# Altium PCB theremania_test_board2.PcbDoc
Units mil, origin at the board's own origin, x right, y up, seen from the top; angles counter-clockwise.
Board outline 3500 x 2640 mil, 2 copper layers (Top Layer, Bottom Layer); 77 components, 50 nets, 239 pads, 15 vias.
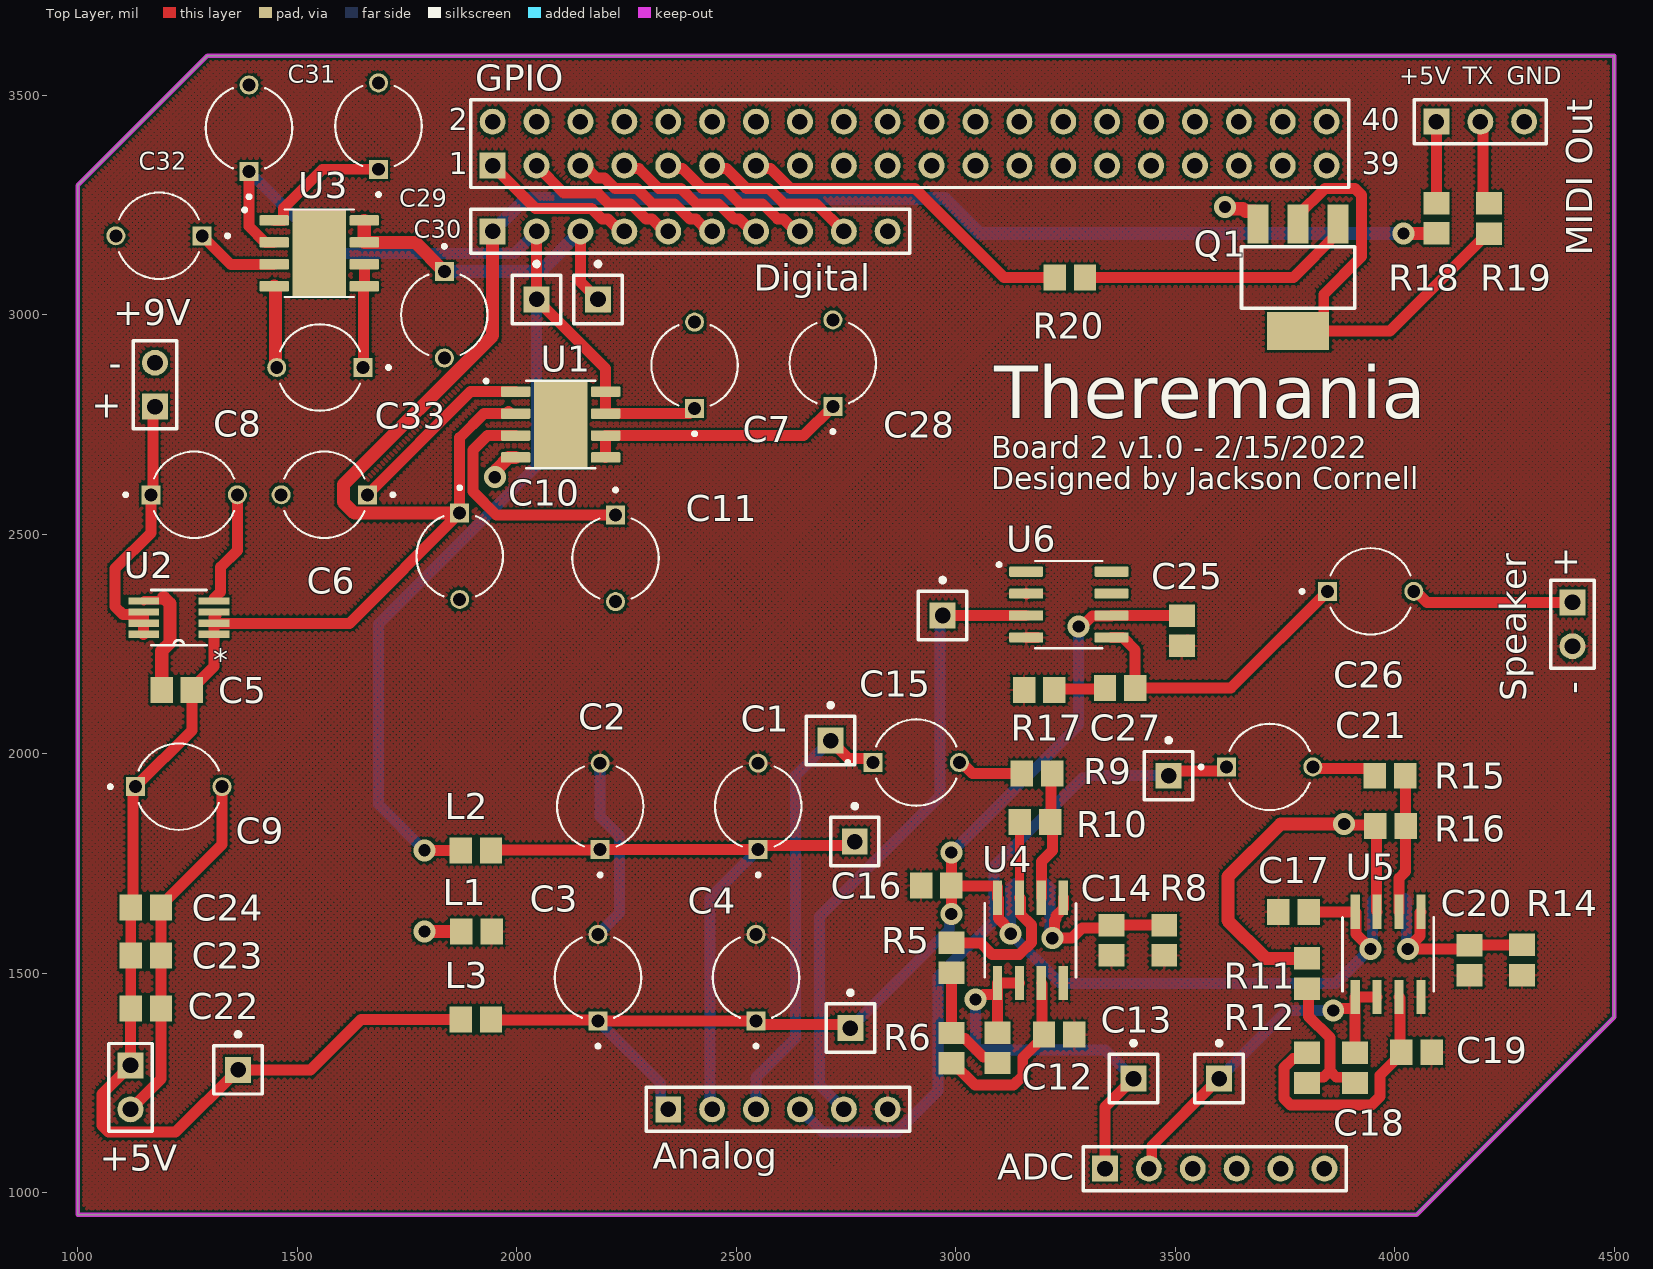
[diagram p0: Top Layer view]
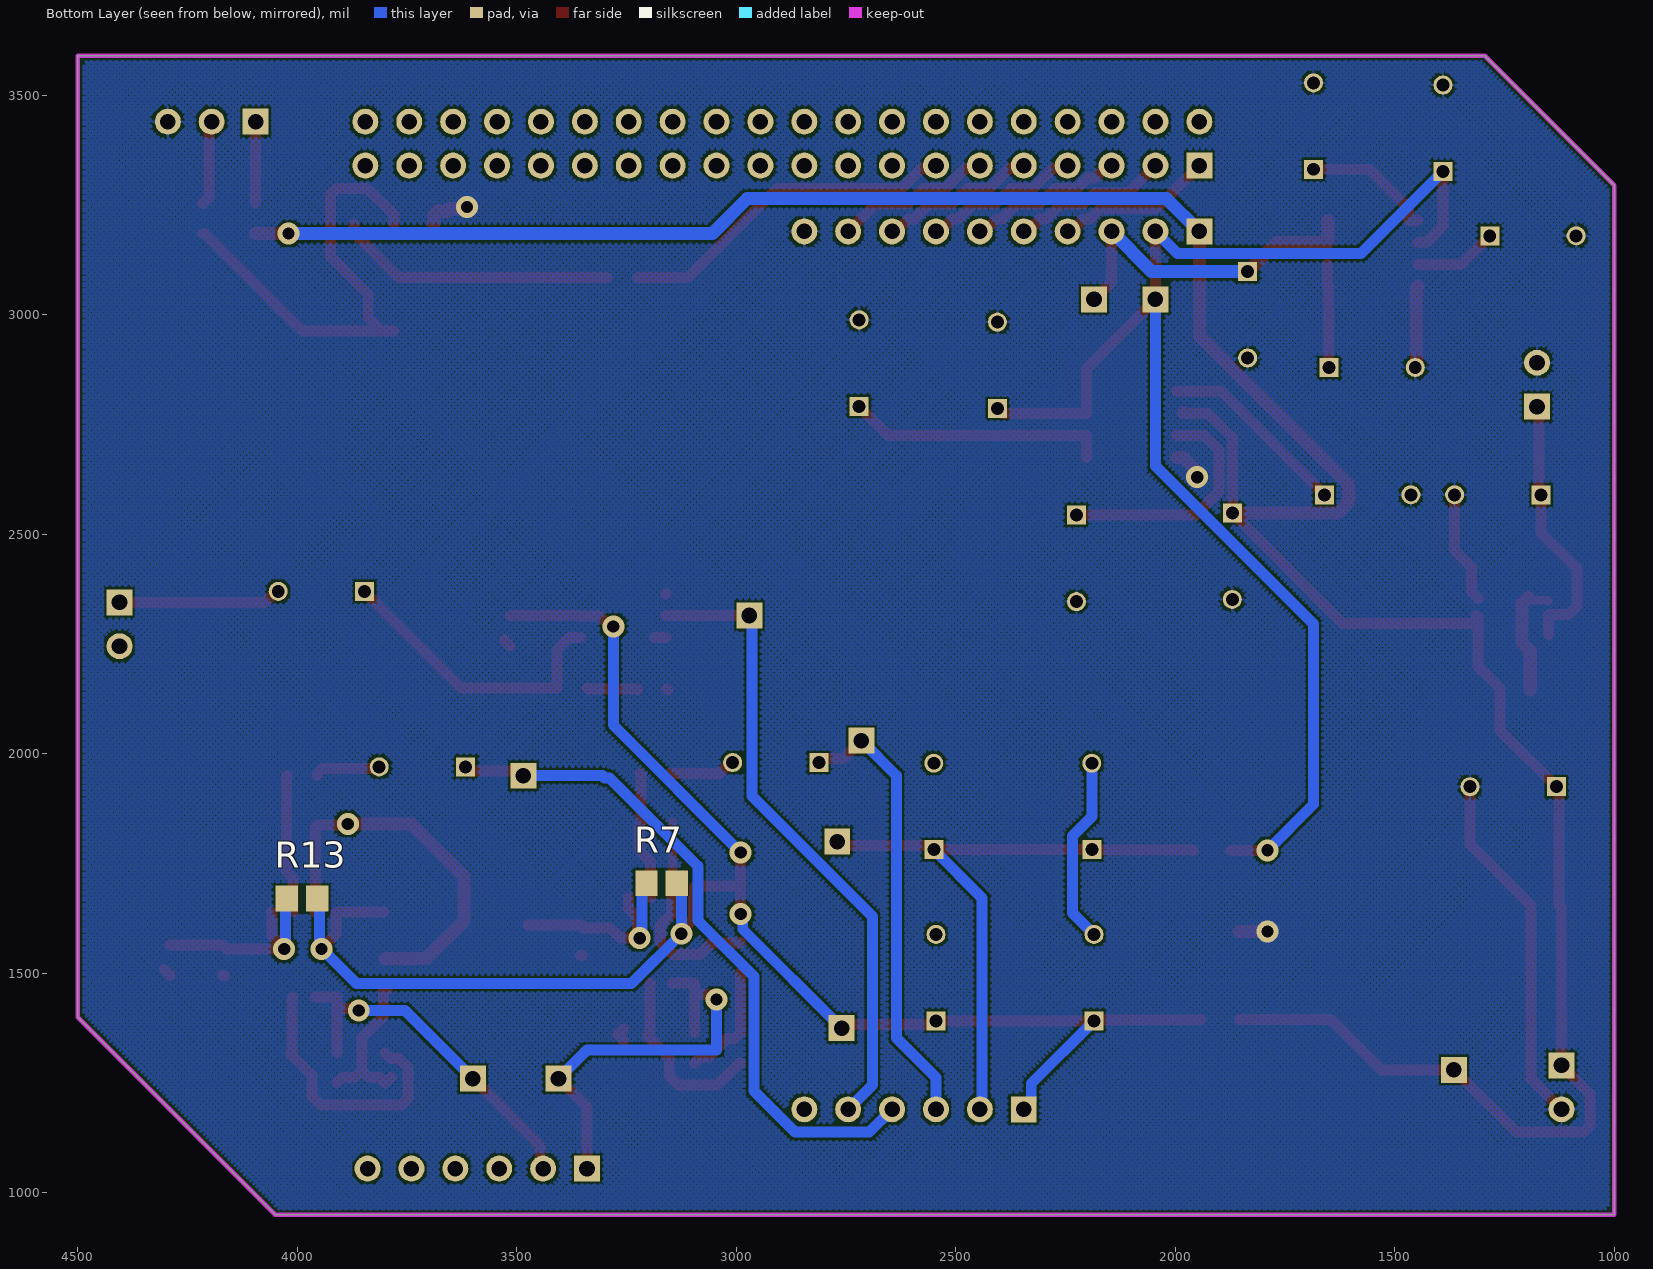
[diagram p1: Bottom Layer view, seen from below]

## Layer stack, top to bottom
Top Solder: solder mask 0.4, Solder Resist, Dk 3.5
Top Layer: signal copper 1.4
Dielectric 1: dielectric 12.6, FR-4, Dk 4.8
Bottom Layer: signal copper 1.4
Bottom Solder: solder mask 0.4, Solder Resist, Dk 3.5

## Board outline
1000,950 1000,3295 1295,3590 4500,3590 4500,1400 4050,950

## Design rules (kind name [scope] priority, off if disabled: settings)
BoardOutlineClearance [All] p1: gap=7.87 ignorepadtopadclearanceinfootprint=FALSE
Clearance [All] p1: gap=5 ignorepadtopadclearanceinfootprint=FALSE except(9.84: Arc-Hole Track-Hole SMDPad-Hole THPad-Hole Via-Hole Fill-Hole Poly-Hole Region-Hole)
ComponentClearance [All] p1: gap=5 collisioncheckmode=3 verticalgap=5 showdistances=TRUE
DiffPairsRouting [All] p1: maxlimit=10 minlimit=5 mostfreqgap=5 toplayer_minwidth=5 toplayer_maxwidth=1000 toplayer_prefwidth=5 bottomlayer_minwidth=5 bottomlayer_maxwidth=1000 bottomlayer_prefwidth=5 maxuncoupledlength=5
Height [All] p1: minheight=0 maxheight=71497.94 prefheight=71497.94
HoleSize [All] p1: absolutevalues=TRUE maxlimit=248.03 minlimit=11.81 maxpercent=80.000 minpercent=20.000
HoleToHoleClearance [All] p1: gap=9.84 allowstackedmicrovias=TRUE
LayerPairs [All] p1: enforce=FALSE
MinimumSolderMaskSliver [All] p1: minsoldermaskwidth=0
PlaneConnect PlaneConnectPowerPads [InPadClass('PowerPads')] p1: planeconnectstyle=Direct reliefexpansion=20 reliefentries=4 reliefconductorwidth=10 reliefairgap=10
PlaneConnect [All] p2: pad.planeconnectstyle=Relief pad.reliefexpansion=11.81 pad.reliefentries=4 pad.reliefconductorwidth=5 pad.reliefairgap=5 via.planeconnectstyle=Direct via.reliefexpansion=11.81 via.reliefentries=4 via.reliefconductorwidth=5 via.reliefairgap=10
PolygonConnect PolygonConnectPowerPads [All vs (InPadClass('PowerPads'))] p1: connectstyle=Direct reliefconductorwidth=10 reliefentries=4 polygonreliefangle="90 Angle" airgapwidth=10
PolygonConnect [All] p2: thpad.connectstyle=Relief thpad.reliefconductorwidth=5 thpad.reliefentries=4 thpad.polygonreliefangle="90 Angle" thpad.airgapwidth=5 smdpad.connectstyle=Relief smdpad.reliefconductorwidth=5 smdpad.reliefentries=4 smdpad.polygonreliefangle="90 Angle" smdpad.airgapwidth=5 via.connectstyle=Direct via.reliefconductorwidth=5 via.reliefentries=4 via.polygonreliefangle="90 Angle" via.airgapwidth=10
RoutingVias [All] p1: holewidth=11.81 width=23.62 viastyle="Through Hole" minholewidth=11.81 minwidth=23.62 maxholewidth=23.62 maxwidth=50
SilkToSilkClearance [All] p1: silktosilkclearance=0
SilkToSolderMaskClearance [IsPad] p1 off: minsilkscreentomaskgap=10 clearancetoexposedcopper=TRUE
SolderMaskExpansion [All] p1: expansion=4
Width [All] p1: maxlimit=1000 minlimit=5 preferedwidth=5 minimp=50.000000 maximp=50.000000 favimp=50.000000
20 further rules are at their usual default settings.

## Classes and differential pairs
component class speaker: C25 C26 C27 R17 Speaker U6
component class preamp: C12 C13 C14 C15 C16 C17 C18 C19 C20 C21 R5 R6 R7 R8 R9 R10 R11 R12 R13 R14 R15 R16 U4 U5
component class power: +9V C1 C2 C3 C4 C5 C6 C7 C8 C9 C10 C11 L1 L2 L3 U1 U2 U3
component class midi: "MIDI Out" R18 R19 R20
component class fpga: +5V ADC C22 C23 C24 GPIO
component class connectors: Analog Digital

## Components (designator, comment, footprint, x,y, rotation, side; value= is the part's Value field where it differs from the comment)
+5V "Header 2" HDR1X2 1120,1290 r270 top
+9V "Header 2" HDR1X2 1175.79,2790.79 r90 top
ADC "Header 6" HDR1X6 3340,1055 r0 top
Analog "Header 6" HDR1X6 2345,1190 r0 top
C1 "10uF" CAPPRD500W50D500H1100 2550,1880 r90 top
C2 "10uF" CAPPRD500W50D500H1100 2190,1880 r90 top
C3 "10uF" CAPPRD500W50D500H1100 2185,1490 r90 top
C4 "10uF" CAPPRD500W50D500H1100 2545,1490 r90 top
C5 "Cap" CAPC0805 1225.55,2145 r0 top value=100pF
C6 "10uF" CAPPRD500W50D500H1100 1561.57,2590 r180 top
C7 "10uF" CAPPRD500W50D500H1100 2405,2885 r90 top
C8 "1uF" CAPPRD500W50D500H1100 1265,2590 r0 top
C9 "1uF" CAPPRD500W50D500H1100 1230,1925 r0 top
C10 "10uF" CAPPRD500W50D500H1100 1870,2450 r270 top
C11 "1uF" CAPPRD500W50D500H1100 2225,2445 r270 top
C12 "Cap" CAPC0805 3095,1330 r90 top value=30pF
C13 "Cap" CAPC0805 3235.55,1360 r180 top value=3pF
C14 "Cap" CAPC0805 3355,1575 r90 top value=0.1uF
C15 "10uF" CAPPRD500W50D500H1100 2910,1980 r0 top
C16 "Cap" CAPC0805 2955.55,1700 r0 top value=0.1uF
C17 "Cap" CAPC0805 3769.45,1640 r0 top value=0.1uF
C18 "Cap" CAPC0805 3910,1284.45 r90 top value=30pF
C19 "Cap" CAPC0805 4049.45,1320 r180 top value=3pF
C20 "Cap" CAPC0805 4170,1529.45 r90 top value=0.1uF
C21 "10uF" CAPPRD500W50D500H1100 3715,1970 r0 top
C22 "Cap" CAPC0805 1155,1420 r180 top value=0.1uF
C23 "Cap" CAPC0805 1155,1540 r180 top value=0.1uF
C24 "Cap" CAPC0805 1155,1650 r180 top value=0.1uF
C25 "Cap" CAPC0805 3515,2280 r90 top value=0.1uF
C26 "270uF" CAPPRD500W50D500H1100 3945,2370 r0 top
C27 "Cap" CAPC0805 3374.45,2150 r180 top value=0.047uF
C28 "1uF" CAPPRD500W50D500H1100 2720,2890 r90 top
C29 "10uF" CAPPRD500W50D500H1100 1685,3430 r90 top
C30 "10uF" CAPPRD500W50D500H1100 1835,3000 r270 top
C31 "10uF" CAPPRD500W50D500H1100 1390,3425 r90 top
C32 "1uF" CAPPRD500W50D500H1100 1185,3180 r180 top
C33 "1uF" CAPPRD500W50D500H1100 1551.57,2880 r180 top
Digital "Header 10" HDR1X10 1945,3190 r0 top
GPIO "Header 20X2" HDR2X20 1945,3340 r0 top
L1 "FB" RES0805 1908.15,1595 r180 top
L2 "FB" RES0805 1906.85,1780 r0 top
L3 "FB" RES0805 1906.85,1395 r0 top
"MIDI Out" "Header 3" HDR1X3 4095,3440 r0 top
P9 "Plug" PIN1 2970,2315 r0 top
P10 "Plug" PIN1 1365,1280 r0 top
P11 "Plug" PIN1 2715,2030 r0 top
P12 "Plug" PIN1 2760,1375 r0 top
P13 "Plug" PIN1 3485,1950 r0 top
P14 "Plug" PIN1 2045,3035 r0 top
P15 "Plug" PIN1 3405,1260 r0 top
P16 "Plug" PIN1 2770,1800 r0 top
P17 "Plug" PIN1 3600,1260 r0 top
P18 "Plug" PIN1 2185,3035 r0 top
Q1 "BCP56HX" SOT-223 3780,3085 r180 top
R5 "Res3" RES0805 2990,1535.55 r270 top value=1K
R6 "Res3" RES0805 2990,1329.45 r270 top value=22K
R7 "Res3" RES0805 3170,1705 r0 bottom value=1K
R8 "Res3" RES0805 3475,1575 r90 top value=1K
R9 "Res3" RES0805 3185,1955 r0 top value=10K
R10 "Res3" RES0805 3180.55,1845 r180 top value=10K
R11 "Res3" RES0805 3800,1499.45 r270 top value=1K
R12 "Res3" RES0805 3800,1284.45 r90 top value=22K
R13 "Res3" RES0805 3989.45,1670 r0 bottom value=1K
R14 "Res3" RES0805 4290,1530 r90 top value=1K
R15 "Res3" RES0805 3989.45,1950 r0 top value=10K
R16 "Res3" RES0805 3990.55,1835 r180 top value=10K
R17 "Res" RES0805 3190,2145 r180 top value=10
R18 "Res" RES0805 4095,3220 r90 top value=220
R19 "Res" RES0805 4215,3219.45 r90 top value=220
R20 "Res" RES0805 3260,3085 r0 top value=10k
Speaker "Header 2" HDR1X2 4405,2345 r270 top
U1 "LDO" SOIC127P600X175-9N 2100,2750 r0 top
U2 "ADP3335ARMZ-5" SOP65P490X110-8N 1230,2310 r180 top
U3 "LDO" SOIC127P600X175-9N 1550,3140 r0 top
U4 "LT1632CS8PBF" SO-8_S 3170,1575 r90 top
U5 "LT1632CS8PBF" SO-8_S 3985,1543 r90 top
U6 "LM386M-1/NOPB" SOIC127P599X175-8N 3257.76,2340 r0 top

## Footprints (in the part's own frame and the unit in brackets; to place one, negate y for a bottom-side part, rotate by r counter-clockwise, add the part's x,y. Pads: shape width x height; smd on the part's side, far side on the other; paste and mask are expansions set on the pad)
CAPC0805 [mm] "Chip Capacitor, 2-Leads, Body 2.01x1.25mm, IPC Medium Density"
  rect 1.3x1.5 smd: 1(-0.875,0) 2(0.875,0)
  body extent -1.1,-0.72 1.11,0.72, height 1.8
CAPPRD500W50D500H1100 [mm]
  round 1.1 hole 0.75: N(2.5,0)
  rect 1.1x1.1 hole 0.75: P(-2.5,0)
  silkscreen extent -4.06,-2.5 2.32,2.5, body extent -2.75,-2.5 2.75,2.5, height 11
HDR1X2 [mm] "Connector; Header; 2 Position"
  rect 1.5x1.5 hole 0.9: 1(0,0)
  round 1.5 hole 0.9: 2(2.54,0)
  silkscreen extent -1.27,-1.27 3.81,1.27
HDR1X3 [mm] "Connector; Header; 3 Position"
  rect 1.5x1.5 hole 0.9: 1(0,0)
  round 1.5 hole 0.9: 2(2.54,0) 3(5.08,0)
  silkscreen extent -1.27,-1.27 6.35,1.27
HDR1X6 [mm] "Connector; Header; 6 Position"
  rect 1.5x1.5 hole 0.9: 1(0,0)
  round 1.5 hole 0.9: 2(2.54,0) 3(5.08,0) 4(7.62,0) 5(10.16,0) 6(12.7,0)
  silkscreen extent -1.27,-1.27 13.97,1.27
HDR1X10 [mm] "Connector; Header; 10 Position"
  rect 1.5x1.5 hole 0.9: 1(0,0)
  round 1.5 hole 0.9: 2(2.54,0) 3(5.08,0) 4(7.62,0) 5(10.16,0) 6(12.7,0) 7(15.24,0) 8(17.78,0) 9(20.32,0) 10(22.86,0)
  silkscreen extent -1.27,-1.27 24.13,1.27
HDR2X20 [mm] "Connector; Header; 20x2 Position"
  rect 1.5x1.5 hole 0.9: 1(0,0)
  round 1.5 hole 0.9: 2(0,2.54) 3(2.54,0) 4(2.54,2.54) 5(5.08,0) 6(5.08,2.54) 7(7.62,0) 8(7.62,2.54) 9(10.16,0) 10(10.16,2.54) 11(12.7,0) 12(12.7,2.54) 13(15.24,0) 14(15.24,2.54) 15(17.78,0) 16(17.78,2.54) 17(20.32,0) 18(20.32,2.54) 19(22.86,0) 20(22.86,2.54) 21(25.4,0) 22(25.4,2.54) 23(27.94,0) 24(27.94,2.54) 25(30.48,0) 26(30.48,2.54) 27(33.02,0) 28(33.02,2.54) 29(35.56,0) 30(35.56,2.54) 31(38.1,0) 32(38.1,2.54) 33(40.64,0) 34(40.64,2.54) 35(43.18,0) 36(43.18,2.54) 37(45.72,0) 38(45.72,2.54) 39(48.26,0) 40(48.26,2.54)
  silkscreen extent -1.27,-1.27 49.53,3.81
PIN1 [mm] "Connector; Plug"
  rect 1.5x1.5 hole 0.9: 1(0,0)
  silkscreen extent -1.4,-1.4 1.4,2.17
RES0805 [mm] "Chip Resistor, 2-Leads, Body 2.01x1.25mm, IPC Medium Density"
  rect 1.3x1.5 smd: 1(-0.875,0) 2(0.875,0)
  body extent -1.1,-0.72 1.11,0.72, height 1.8
SO-8_S [mil]
  rect 78x21 smd: 1(-97,75) 2(-97,25) 3(-97,-25) 4(-97,-75) 5(97,-75) 6(97,-25) 7(97,25) 8(97,75)
  silkscreen extent -84,-104 84,104
SOIC127P599X175-8N [mm]
  rrect25% 1.97x0.6 smd: 1(-2.47,1.905) 2(-2.47,0.635) 3(-2.47,-0.635) 4(-2.47,-1.905) 5(2.47,-1.905) 6(2.47,-0.635) 7(2.47,0.635) 8(2.47,1.905)
  silkscreen extent -4.14,-2.52 1.95,2.52
SOIC127P600X175-9N [mm]
  rrect25% 1.71x0.61 smd: 1(-2.605,1.905) 2(-2.605,0.635) 3(-2.605,-0.635) 4(-2.605,-1.905) 5(2.605,-1.905) 6(2.605,-0.635) 7(2.605,0.635) 8(2.605,1.905)
  rect 3.1x5 smd paste-3: 9(0,0)
  silkscreen extent -4.41,-2.53 2,2.61
SOP65P490X110-8N [mil]
  rect 70x17 smd: 1(-80,38) 2(-80,13) 3(-80,-13) 4(-80,-38) 5(80,-38) 6(80,-13) 7(80,13) 8(80,38)
  silkscreen extent -63,-63 63,63
SOT-223 [mil]
  rect 48x88 smd: 1(-91,-122) 2(0,-122) 3(91,-122)
  rect 141.73x86.61 smd: 4(0,122.01)
  silkscreen extent -129,-70 129,70

## Part data
+5V +9V Speaker: "Header, 2-Pin", LatestRevisionDate=17-Jul-2002, LatestRevisionNote="Re-released for DXP Platform.", Publisher="Altium Limited"
ADC Analog: "Header, 6-Pin", LatestRevisionDate=17-Jul-2002, LatestRevisionNote="Re-released for DXP Platform.", Publisher="Altium Limited"
C1 C2 C3 C4 C6 C7 C8 C9 C10 C11 C15 C21 C26 C28 C29 C30 C31 C32 C33: library part EEUFS0J221B, "Aluminum Electrolytic Capacitors, 220uF, 6.3V, -40 to 105C", Package="RADIAL-2 Panasonic", Availability="In Stock", Check_prices=https://www.snapeda.com/parts/EEUFS0J221B/Panasonic/view-part/5796863/?ref=eda, MF=Panasonic, MP=EEUFS0J221B, Price=None, Purchase-URL=https://pricing.snapeda.com/search/part/EEUFS0J221B/?ref=eda, SnapEDA_Link=https://www.snapeda.com/parts/EEUFS0J221B/Panasonic/view-part/5796863/?ref=snap
C5 C25 C27: Supplier Part Number 1=1276-1000-1-ND, Supplier 1=Digi-Key
C12 C13 C14 C16 C17 C18 C19 C20 C22 C23 C24: "Capacitor", LatestRevisionDate=17-Jul-2002, LatestRevisionNote="Re-released for DXP Platform.", PackageDescription="Radial Cap, Thru-Hole; 2 Leads; 0.3 in Pin Spacing", PackageReference=RAD-0.3, Published=8-Jun-2000, Publisher="Altium Limited"
Digital: "Header, 10-Pin", LatestRevisionDate=17-Jul-2002, LatestRevisionNote="Re-released for DXP Platform.", Publisher="Altium Limited"
GPIO: "Header, 20-Pin, Dual row", LatestRevisionDate=17-Jul-2002, LatestRevisionNote="Re-released for DXP Platform.", Publisher="Altium Limited"
L1 L2 L3: library part Inductor, "Inductor", Code_IEC=1005, Code_JEITA=0402, LatestRevisionDate=29-May-2009, LatestRevisionNote="IPC-7351 Footprint Added.", PackageDescription="Chip Inductor", PackageReference=0402-A, Published=8-Jun-2000, Publisher="Altium Limited"
"MIDI Out": "Header, 3-Pin", LatestRevisionDate=17-Jul-2002, LatestRevisionNote="Re-released for DXP Platform.", Publisher="Altium Limited"
Q1: library part STN2580, "Bipolar (BJT) Transistor NPN 400V 1A 1.6W Surface Mount SOT-223", Package="SOT-223 STMicroelectronics", Availability=Unavailable, MF=STMicroelectronics, MP=STN2580, Price=None, SnapEDA_Link=https://www.snapeda.com/parts/STN2580/STMicroelectronics/view-part/815004/?ref=snap
R5 R6 R7 R8 R9 R10 R11 R12 R13 R14 R15 R16: "Resistor", LatestRevisionDate=29-May-2009, LatestRevisionNote="IPC-7351 Footprint Added.", PackageDescription="Chip Resistor", PackageReference=J1-0603, Published=8-Jun-2000, Publisher="Altium Limited"
R17 R18 R19 R20: Supplier Part Number 1=RMCF0603JT10K0CT-ND, Supplier 1=Digi-Key
U1 U3: library part ADM7154
U2: library part ADP3335ARMZ-3.3, "Linear Voltage Regulator IC 1 Output 500mA 8-MSOP", Package="MSOP-8 Analog Devices", Availability=Unavailable, MF="Analog Devices", MP=ADP3335ARMZ-3.3, Price=None, SnapEDA_Link=https://www.snapeda.com/parts/ADP3335ARMZ-3.3/Analog%20Devices/view-part/674568/?ref=snap
U4 U5: "45MHz, 45V/ms, Dual/Quad Rail-to-Rail Input and Output  Precision Op Amps", Package=None, Availability=Unavailable, MP=LT1632CS8PBF, Price=None
U6: "Wide Input Voltage Low Power Audio Amplifier with Internal Gain", Package="SOIC-8 Texas Instruments", Availability=Unavailable, MF="Texas Instruments", MP=LM386M-1, Price=None, SnapEDA_Link=https://www.snapeda.com/parts/LM386M-1/Texas%20Instruments/view-part/2583261/?ref=snap
P9 P10 P11 P12 P13 P14 P15 P16 P17 P18: LatestRevisionDate=17-Jul-2002, LatestRevisionNote="Re-released for DXP Platform.", Publisher="Altium Limited"

## Via types
v1: diameter 50, hole 28, Top Layer to Bottom Layer, 15 vias

## Nets (pads, with @x,y where several pads share a name; then routed paths per layer and width w, separated by ;. In a path a pad name is that pad's centre, name@x,y a point inside that pad or via, vN(x,y) a via of type N, cw(c..) or ccw(c..) an arc to the next point about the centre after c; other vN are vias at no path point)
1.2VD: C30.P Digital.3 P18.1 U3.7 U3.8 | length 803.6
  Top Layer w25: Digital.3 2145,3075 P18.1 P18.1@2202.03,3017.97
  Top Layer w30: U3.8 U3.7 1768.43,3165 C30.P
  Bottom Layer w30: C30.P 2053.43,3098.43 Digital.3
3.3VA: Analog.2 C1.P C2.P L2.2 P16.1 | length 1457.5
  Top Layer w25: L2.2@1960,1780 1960.79,1780.79 2189.21,1780.79 C2.P C1.P 2559.15,1790.73 2760.73,1790.73 P16.1
  Bottom Layer w25: Analog.2 2440,1195 2440,1671.57 C1.P
3.3VD: C7.P C31.P Digital.2 L2.1 P14.1 U1.7 U1.8 U3.2 | length 3168
  Top Layer w25: C31.P 1390,3201.77 1426.77,3165 U3.2 ; v1(1790,1780) L2.1 ; Digital.2 P14.1 2202.56,2877.44 U1.8 U1.7 2393.43,2775 C7.P
  Bottom Layer w25: C31.P 1576.57,3140 1995,3140 Digital.2 ; v1(1790,1780) 1685,1885 1685,2295.37 2045,2655.37 P14.1
5VA: Analog.1 C3.P C4.P C16.2 C17.2 C25.2 L3.2 P12.1 R7.1 R13.1 U4.8 U5.8 U6.6 | length 4039.6
  Top Layer w25: L3.2 1943.01,1393.29 2183.29,1393.29 C3.P C4.P 2553.29,1383.29 2751.71,1383.29 P12.1 ; v1(2990,1635) C16.2 ; v1(2990,1775) C16.2 ; v1(3125,1590) 3125,1596.76 3097,1624.76 3097,1670 U4.8 3095,1696.5 3093,1698.5 2991.5,1698.5 C16.2 ; v1(3280,2290) 3286.76,2290 3311.08,2314.31 3354.31,2314.31 U6.6 3355.28,2314.72 3514.72,2314.72 C25.2 ; C17.2 U5.8 3912,1638 3912,1589.76 3945,1556.76 v1(3945,1555)
  Bottom Layer w25: C3.P 2327.97,1248.6 2327.97,1207.03 Analog.1 ; P12.1 2985.22,1600.22 2985.22,1630.22 v1(2990,1635) ; v1(2990,1775) 3280,2065 v1(3280,2290) ; R7.1 3125,1694.45 v1(3125,1590) 3238.24,1476.76 3865,1476.76 3938.24,1550 3940,1550 v1(3945,1555) 3949.78,1559.78 3949.78,1664.78 R13.1
5VD: +5V.1 C5.2 C9.P C10.P C22.2 C23.2 C24.2 Digital.1 L3.1 P10.1 R18.1 U1.2 U2.1 U2.2 U2.3 | length 6422.2
  Top Layer w25: U2.3@1315,2315 1310,2310 U2.2 ; L3.1@1853.7,1395 1645,1395 1530,1280 P10.1 1222.97,1137.97 1069.64,1137.97 1055,1152.62 1055,1225 +5V.1 1120.28,1290.28 1120.28,1419.72 C22.2 C23.2 C24.2 1126.06,1655.51 1126.06,1919.49 C9.P 1260,2053.43 C5.2 1260,2148.94 1310,2198.94 U2.1 U2.2 ; C10.P@1869.92,2548.35 1618.57,2297 U2.2 ; C10.P 1870,2720 1925,2775 1984,2775 1985,2776 U1.2@1981,2780
  Top Layer w30: C10.P 1869.92,2548.35 1630.06,2548.35 1605,2573.41 1605,2612.67 1945,2952.67 Digital.1 ; v1(4020,3185) 4094.45,3185 R18.1
  Bottom Layer w25: +5V.1 +5V.1@1130,1280
  Bottom Layer w30: Digital.1 2020,3265 2025,3265 2974.79,3265 3054.79,3185 v1(4020,3185)
9V: +9V.1 C8.P U2.6 U2.7 U2.8 | length 609.7
  Top Layer w25: U2.8 U2.7 1150,2315 1148,2317 1103,2317 1085,2335 1085,2421.71 1166.57,2503.29 C8.P 1171.18,2594.61 1171.18,2786.18 +9V.1
ADC_CH0: ADC.1 C12.2 P15.1 U4.1 U4.2 | length 953
  Top Layer w25: v1(3045,1440) 3051.76,1440 3063.26,1451.5 3093,1451.5 U4.1@3095,1453.5 ; C12.2 U4.1@3095,1453.5 ; U4.2 U4.1 U4.1@3095,1453.5 ; ADC.1 3340,1195 P15.1
  Bottom Layer w25: v1(3045,1440) 3045,1325 3340,1325 P15.1
ADC_CH1: ADC.2 C18.2 P17.1 U5.1 U5.2 | length 825.3
  Top Layer w25: ADC.2 3446.52,1061.52 3446.52,1106.52 P17.1 ; v1(3860,1415) 3864.5,1419.5 3908,1419.5 U5.1@3910,1421.5 ; C18.2 U5.1@3910,1421.5 ; U5.2 U5.1 U5.1@3910,1421.5
  Bottom Layer w25: P17.1 3755,1415 v1(3860,1415)
ADC_CH2: ADC.3
ADC_CH3: ADC.4
ADC_CH4: ADC.5
ADC_CH5: ADC.6
AGND: Analog.6 C1.N C2.N C3.N C4.N C13.1 C14.1 C16.1 C17.1 C19.1 C20.1 C25.1 L1.1 R8.1 R14.1 R17.2 Speaker.2 U4.4 U5.4 U6.2 U6.4 | length 546.1
  Top Layer w25: C3.N@2181.71,1591.71 C3.N ; R17.2 R17.2@3158.03,2147.48 ; U6.4 U6.4@3186.1,2265 ; U6.2 U6.2@3161.2,2364.31 ; C13.1@3256.91,1346.91 C13.1 C13.1@3256.91,1373.09 ; C14.1@3351.06,1540.55 C14.1 ; C25.1 C25.1@3528.09,2258.64 ; C20.1@4166.06,1495 C20.1 C20.1@4170.28,1495.28 ; R14.1@4289.72,1495.28 R14.1 R14.1@4303.09,1508.64
  Bottom Layer w25: C3.N 2234.15,1637.58 2234.15,1812.55 2190,1856.7 C2.N
CS: Digital.7 GPIO.7 | length 362.1
  Top Layer w25: GPIO.7 2251.52,3333.48 2277.94,3333.48 2323.45,3287.97 2373.95,3287.97 2408.95,3252.97 2459.45,3252.97 2494.45,3217.97 2507.81,3217.97 2535.78,3190 Digital.7
GND: "MIDI Out.3" +5V.2 +9V.2 C6.N C7.N C8.N C9.N C10.N C11.N C22.1 C23.1 C24.1 C28.N C29.N C30.N C31.N C32.N C33.N Digital.10 L1.2 Q1.3 U1.4 U2.4 U3.4 | length 1529
  Top Layer w25: +5V.2 1189.45,1259.45 C22.1 C23.1 C24.1 1189.45,1653.94 1328.43,1792.91 C9.N ; +9V.2 +9V.2@1185,2890.79 ; U2.4@1310,2354 1325,2369 1325,2425 1363.43,2463.43 C8.N
  Top Layer w30: U3.4 1447.61,3065 1450.6,3062.01 1450.6,2882.55 C33.N ; v1(1790,1595) L1.2@1855,1595 ; v1(1950,2630) 1953.83,2633.83 1953.83,2647.06 1981.77,2675 U1.4 ; Digital.10 Digital.10@2850,3195 ; v1(3613.31,3245.62) 3617.14,3241.79 3654.21,3241.79 3660,3236 3680,3236 3689,3227 Q1.3
  Bottom Layer w30: C9.N C9.N@1328.43,1928.6
GO: Digital.8 GPIO.9 | length 362.1
  Top Layer w25: GPIO.9 2351.52,3333.48 2377.94,3333.48 2423.45,3287.97 2473.95,3287.97 2508.95,3252.97 2559.45,3252.97 2594.45,3217.97 2607.81,3217.97 2635.78,3190 Digital.8
LINE_OUT: Analog.5 P9.1 U6.3 | length 1454.3
  Top Layer w25: P9.1 U6.3
  Bottom Layer w25: Analog.5 2690,1245 2690,1629.12 2964.27,1903.4 2964.27,2309.27 P9.1
MIC_IN: Analog.4 C21.P P13.1 | length 1563.3
  Top Layer w25: P13.1 3495.85,1960.85 3607.42,1960.85 C21.P
  Bottom Layer w25: Analog.4 2697.03,1137.97 2866.55,1137.97 2960,1231.42 2960,1492.18 3087.46,1619.64 3087.46,1743.85 3288.61,1945 3300,1945 3305,1950 P13.1
MISO: Digital.6 GPIO.5 | length 362.1
  Top Layer w25: GPIO.5 2154.22,3340 2182.19,3312.03 2199.39,3312.03 2223.45,3287.97 2273.95,3287.97 2308.95,3252.97 2359.45,3252.97 2394.45,3217.97 2407.81,3217.97 2435.78,3190 Digital.6
MOSI: Digital.5 GPIO.3 | length 362.1
  Top Layer w25: GPIO.3 2107.97,3277.03 2184.9,3277.03 2208.95,3252.97 2259.45,3252.97 2294.45,3217.97 2307.81,3217.97 2335.78,3190 Digital.5
NetC5_1: C5.1 U2.5 | length 274.8
  Top Layer w15: U2.5 U2.5@1150,2349
  Top Layer w20: U2.5 1151.5,2349.5 1189.5,2349.5 1195.93,2355.93
  Top Layer w30: C5.1 1191.1,2234.25 1210,2253.14 1210,2341.86 1195.93,2355.93
NetC6_P: C6.P U1.1 | length 434.8
  Top Layer w25: C6.P 1895,2825 U1.1
NetC11_P: C11.P U1.3 | length 553.2
  Top Layer w25: U1.3 1933.04,2725 1900,2691.96 1900,2597.19 1953.77,2543.43 C11.P
NetC12_1: C12.1 R5.2 R6.1 | length 270.5
  Top Layer w25: R5.2 R6.1 3003.09,1350.81 3021.13,1350.81 3063.3,1308.64 3081.91,1308.64 C12.1
NetC13_2: C13.2 R6.2 U4.3 | length 426.5
  Top Layer w25: R6.2 2993.94,1295 3043.94,1245 3131.39,1245 3152.66,1266.27 3152.66,1307.62 3201.1,1356.06 C13.2 3197,1364.1 3197,1476 U4.3
NetC14_2: C14.2 R7.2 R8.2 U4.5 | length 501
  Top Layer w25: U4.5 3245,1647.5 3228,1630.5 3228,1623.68 3224.78,1620.46 3224.78,1584.78 v1(3220,1580) 3265,1580 3287.97,1602.97 3348.52,1602.97 C14.2 R8.2
  Bottom Layer w25: R7.2 3215.22,1694.23 3215.22,1584.78 v1(3220,1580)
NetC15_N: C15.N R9.1 | length 152.5
  Top Layer w25: C15.N 3013.38,1980 3038.38,1955 R9.1
NetC18_1: C18.1 R11.2 R12.1 | length 366
  Top Layer w25: R12.1@3786.91,1263.09 R12.1 3813.09,1263.09 3837.86,1263.09 3852.38,1277.62 ; R11.2@3796.07,1461.07 R11.2 3803.93,1461.07 3803.93,1401.91 3852.38,1353.45 3852.38,1277.62 ; C18.1 3896.91,1263.09 3866.91,1263.09 3852.38,1277.62
NetC19_2: C19.2 R12.2 U5.3 | length 617.4
  Top Layer w25: R12.2 3786.91,1305.81 3768.87,1305.81 3747.97,1284.91 3747.97,1215.09 3763.06,1200 3946.94,1200 3966.55,1219.62 3966.55,1267.62 4015,1316.06 4012,1319.06 4012,1444 U5.3
NetC20_2: C20.2 R13.2 R14.2 U5.5 | length 479
  Top Layer w25: U5.5 4058,1638 4058,1584.76 4030,1556.76 v1(4030,1555) 4034.57,1555 4034.78,1554.78 4160.89,1554.78 C20.2 4170.28,1564.17 4289.72,1564.17 R14.2
  Bottom Layer w25: R13.2 4026.95,1666.95 4026.95,1558.05 v1(4030,1555)
NetC21_N: C21.N R15.1 | length 151.9
  Top Layer w25: C21.N 3816.93,1966.5 3941.91,1966.5 3955,1953.41 R15.1
NetC26_N: C26.N Speaker.1 | length 371.9
  Top Layer w25: C26.N 4048.38,2370 4073.38,2345 Speaker.1
NetC26_P: C26.P C27.1 U6.5 | length 681.1
  Top Layer w25: U6.5 3380.59,2265 3408.9,2236.69 C27.1 3626.57,2150 C26.P
NetC27_2: C27.2 R17.1 | length 117.6
  Top Layer w25: R17.1 3226.95,2147.5 3337.5,2147.5 C27.2
NetC28_P: C28.P U1.5 U1.6 | length 595
  Top Layer w25: U1.5 U1.6 2653.43,2725 C28.P
NetC29_P: C29.P U3.1 | length 301.8
  Top Layer w25: U3.1 1468.11,3215 1468.6,3215.49 1468.6,3242.8 1557.38,3331.57 C29.P
NetC32_P: C32.P U3.3 | length 190.9
  Top Layer w25: C32.P 1348.43,3115 U3.3
NetC33_P: C33.P U3.5 U3.6 | length 236.5
  Top Layer w25: C33.P 1651.28,2881.28 1651.28,3064.51 1651.77,3065 U3.5 U3.6
"NetMIDI Out_1": "MIDI Out.1" R18.2 | length 185.6
  Top Layer w25: R18.2 4095,3440
"NetMIDI Out_2": "MIDI Out.2" R19.2 | length 194.6
  Top Layer w25: 4195,3440 4201.52,3433.48 4201.52,3266.99 4214.61,3253.9 R19.2
NetQ1_1: Q1.1 R20.2 | length 638.8
  Top Layer w25: R20.2 3769,3085 3871,3187 Q1.1
NetQ1_4: Q1.2 Q1.4 R19.1 | length 1109.3
  Top Layer w25: Q1.2 3780,3227 3841.05,3288.05 3909.79,3288.05 3924.44,3273.4 3924.44,3132.48 3838.37,3046.41 3838.37,2993.8 3807.56,2962.99 Q1.4 3780.22,2962.78 3988.84,2962.78 4211.06,3185 R19.1
NetR5_1: R5.1 R10.2 U4.7 | length 491.9
  Top Layer w20: U4.7 3145.5,1672.5 3145.5,1844.4 R10.2
  Top Layer w25: R5.1 2991.47,1568.53 3057.03,1568.53 3083.06,1542.5 3144.68,1542.5 3172.5,1570.32 3172.5,1609.68 3147,1635.18 3147,1670 U4.7
NetR9_2: R9.2 R10.1 U4.6 | length 297.3
  Top Layer w25: U4.6 3195,1755 3220,1780 3220,1840 R10.1 3217.22,1847.22 3217.22,1952.78 R9.2
NetR11_1: R11.1 R16.2 U5.7 | length 902.9
  Top Layer w25: R11.1@3798.05,1531.95 R11.1 ; v1(3885,1840) 3887.5,1837.5 3953.6,1837.5 R16.2 3958.05,1833.05 3958.05,1641.95 U5.7
  Top Layer w30: R11.1 3706.1,1533.9 3620,1620 3620,1720 3740,1840 v1(3885,1840)
NetR15_2: R15.2 R16.1 U5.6 | length 316.7
  Top Layer w25: U5.6 4010,1716.5 4025,1731.5 R16.1 4024.45,1835.55 4024.45,1949.45 R15.2
RST: Digital.9 GPIO.11 | length 362.1
  Top Layer w25: GPIO.11 2451.52,3333.48 2477.94,3333.48 2523.45,3287.97 2573.95,3287.97 2608.95,3252.97 2682.03,3252.97 Digital.9
SCLK: Digital.4 GPIO.1 | length 362.1
  Top Layer w25: GPIO.1 2042.97,3242.03 2093.47,3242.03 2170.4,3242.03 2194.45,3217.97 2207.81,3217.97 2235.78,3190 Digital.4
THEREMIN_OUT: Analog.3 C15.P P11.1 | length 1027.7
  Top Layer w25: P11.1 2755.85,1989.15 2802.42,1989.15 C15.P
  Bottom Layer w25: Analog.3 2545,1262.11 2635,1352.11 2635,1950 P11.1
TX: GPIO.13 R20.1 | length 786.2
  Top Layer w25: GPIO.13 2551.52,3333.48 2577.94,3333.48 2623.45,3287.97 2907.03,3287.97 3110,3085 R20.1
pads on no net: GPIO.2 GPIO.4 GPIO.6 GPIO.8 GPIO.10 GPIO.12 GPIO.14 GPIO.15 GPIO.16 GPIO.17 GPIO.18 GPIO.19 GPIO.20 GPIO.21 GPIO.22 GPIO.23 GPIO.24 GPIO.25 GPIO.26 GPIO.27 GPIO.28 GPIO.29 GPIO.30 GPIO.31 GPIO.32 GPIO.33 GPIO.34 GPIO.35 GPIO.36 GPIO.37 GPIO.38 GPIO.39 GPIO.40 U1.9 U3.9 U6.1 U6.7 U6.8

## Polygon pours and split planes (outlines as drawn)
GND on Bottom Layer "Bottom Layer-GND" (hatched 45Degree grid 10 track 8, pour order 20): 1000,950 1000,3295 1295,3590 4500,3590 4500,1400 4050,950
no net on Bottom Layer "Bottom Layer-No Net" (hatched 45Degree grid 10 track 8, pour order 4): 1000,1000
AGND on Top Layer "Top Layer-AGND" (hatched 45Degree grid 10 track 8, pour order 18): 1000,950 1000,3295 1295,3590 4500,3590 4500,1400 4050,950
no net on Top Layer "Top Layer-No Net" (hatched 45Degree grid 10 track 8, pour order 14): 1410,605

## Keep-outs
Keep-Out Layer:
  the board outline again, w10

## Silkscreen, mask and mechanical layers (free items; w line width, h text height)
Top Overlay:
  text "+5V" at 4010,3525 h40
  text "TX" at 4155,3525 h40
  text "GND" at 4255,3525 h40
  text "-" at 1100,2860 h60
  text "+" at 1100,2765 h60
  text "Theremania" at 3088.21,2764.78 h120
  text "Board 2 v1.0 - 2/15/2022" at 3081.14,2672.86 h50
  text "Designed by Jackson Cornell" at 3081.14,2602.15 h50
  text "+" at 4425,2410 h60
  text "-" at 4435,2165 h60 r90

## Text inside footprints (layer, text, board x,y; h text height)
GPIO: Top Overlay "39" at 3925,3320 h50; Top Overlay "40" at 3925,3420 h50; Top Overlay "2" at 1845,3420 h50; Top Overlay "1" at 1845,3320 h50
U2: Top Overlay "*" at 1343,2260 h50 r180; Mechanical 13 "*" at 1343,2260 h50 r180; Mechanical 13 "*" at 1343,2260 h50 r180